# Altium PCB IMU_PCB.PcbDoc
Units mm, origin at the board's own origin, x right, y up, seen from the top; angles counter-clockwise.
Board outline 40 x 40 mm, 2 copper layers (Top Layer, Bottom Layer); 15 components, 11 nets, 71 pads, 0 vias.
Unrouted connection lines stored in the file: 24.
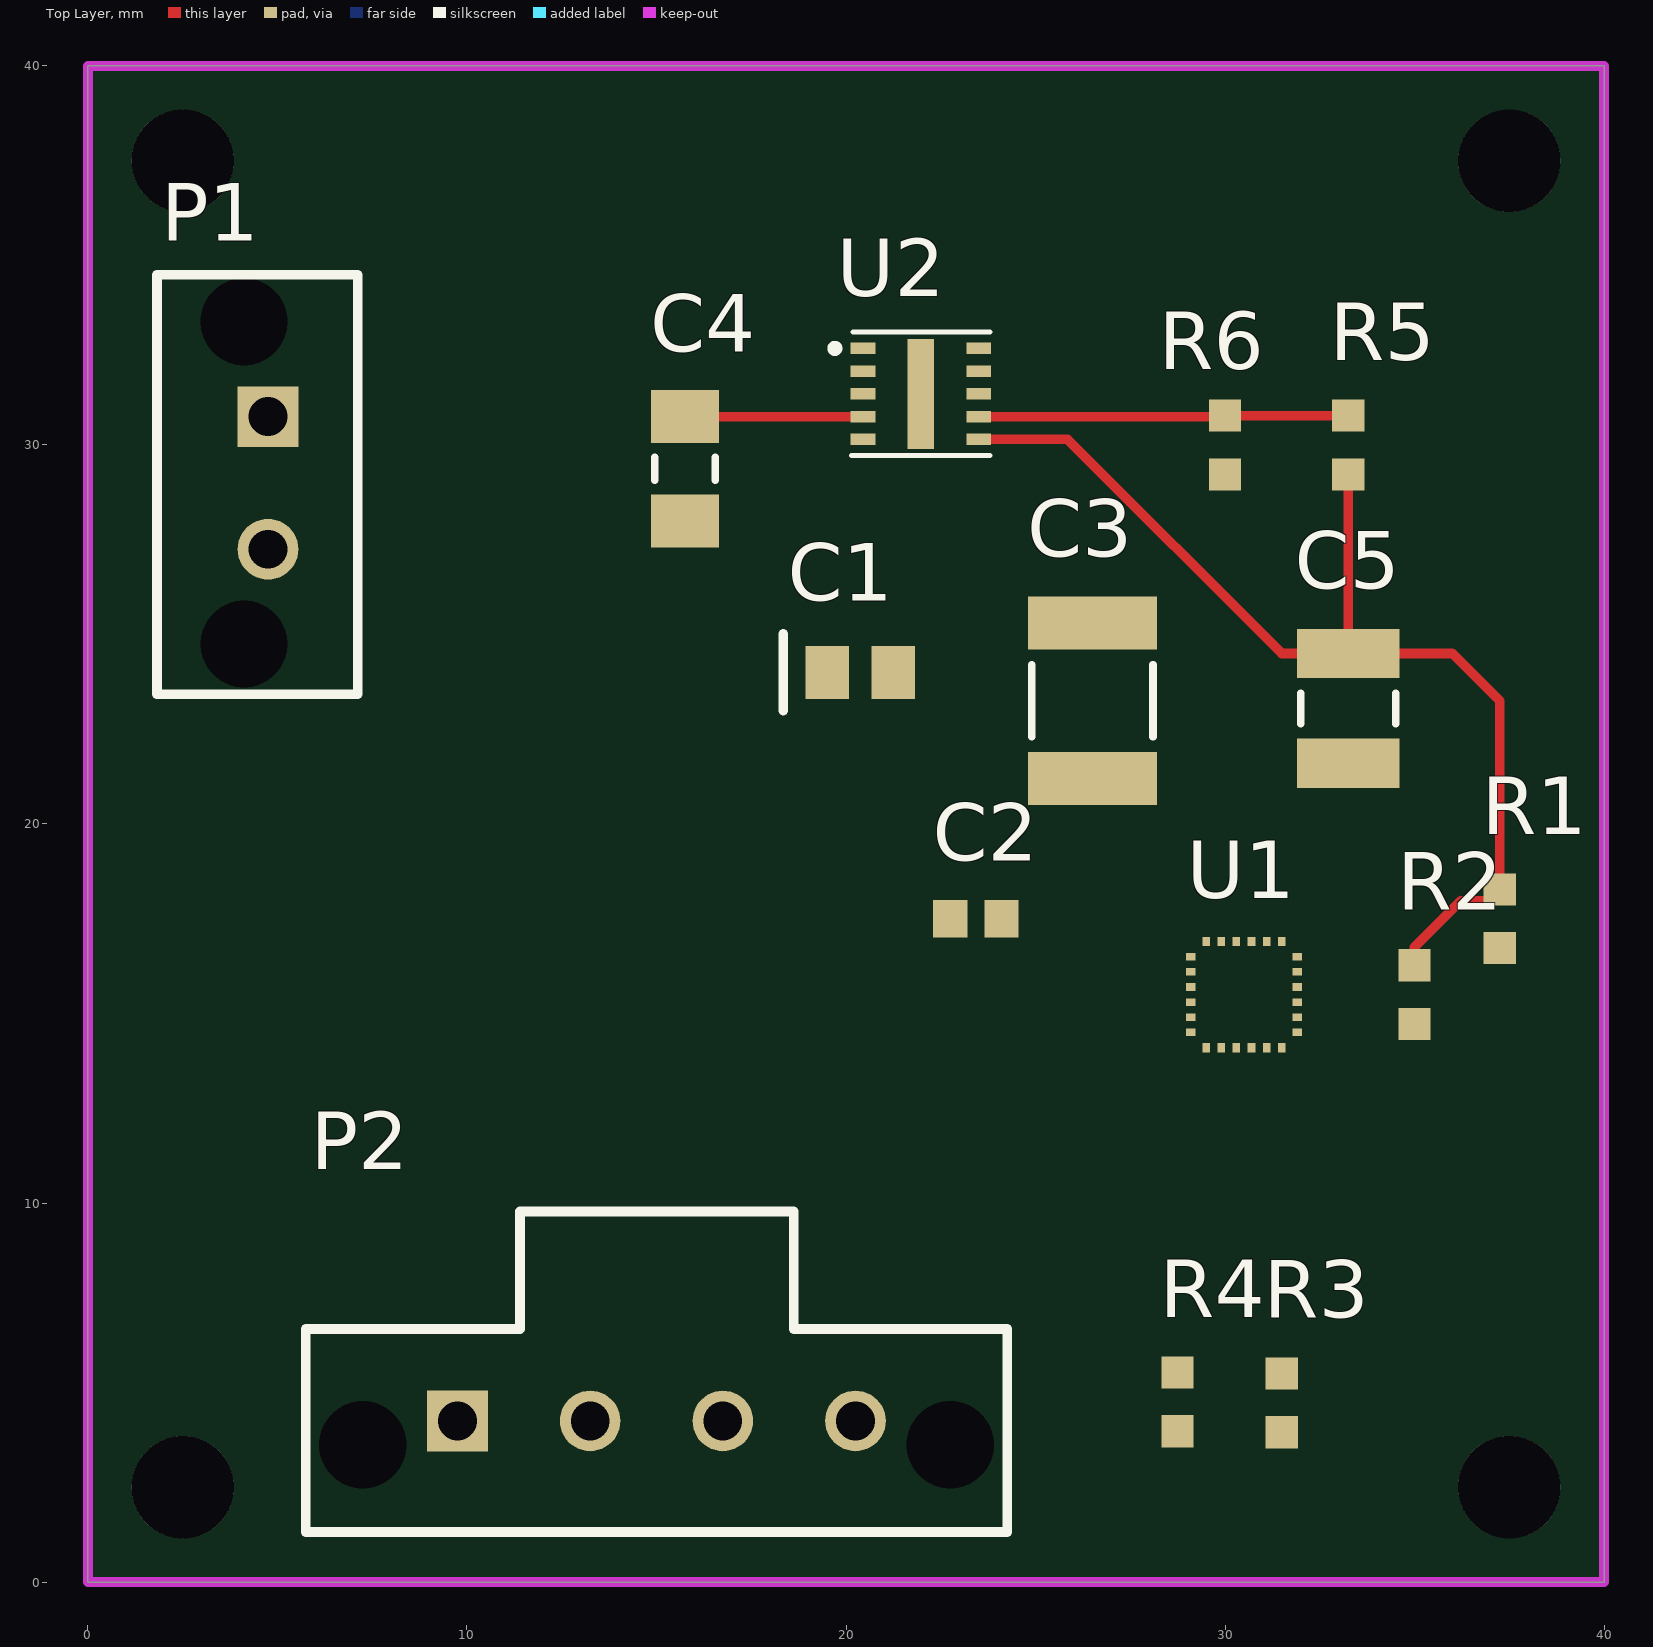
[diagram p0: Top Layer view]
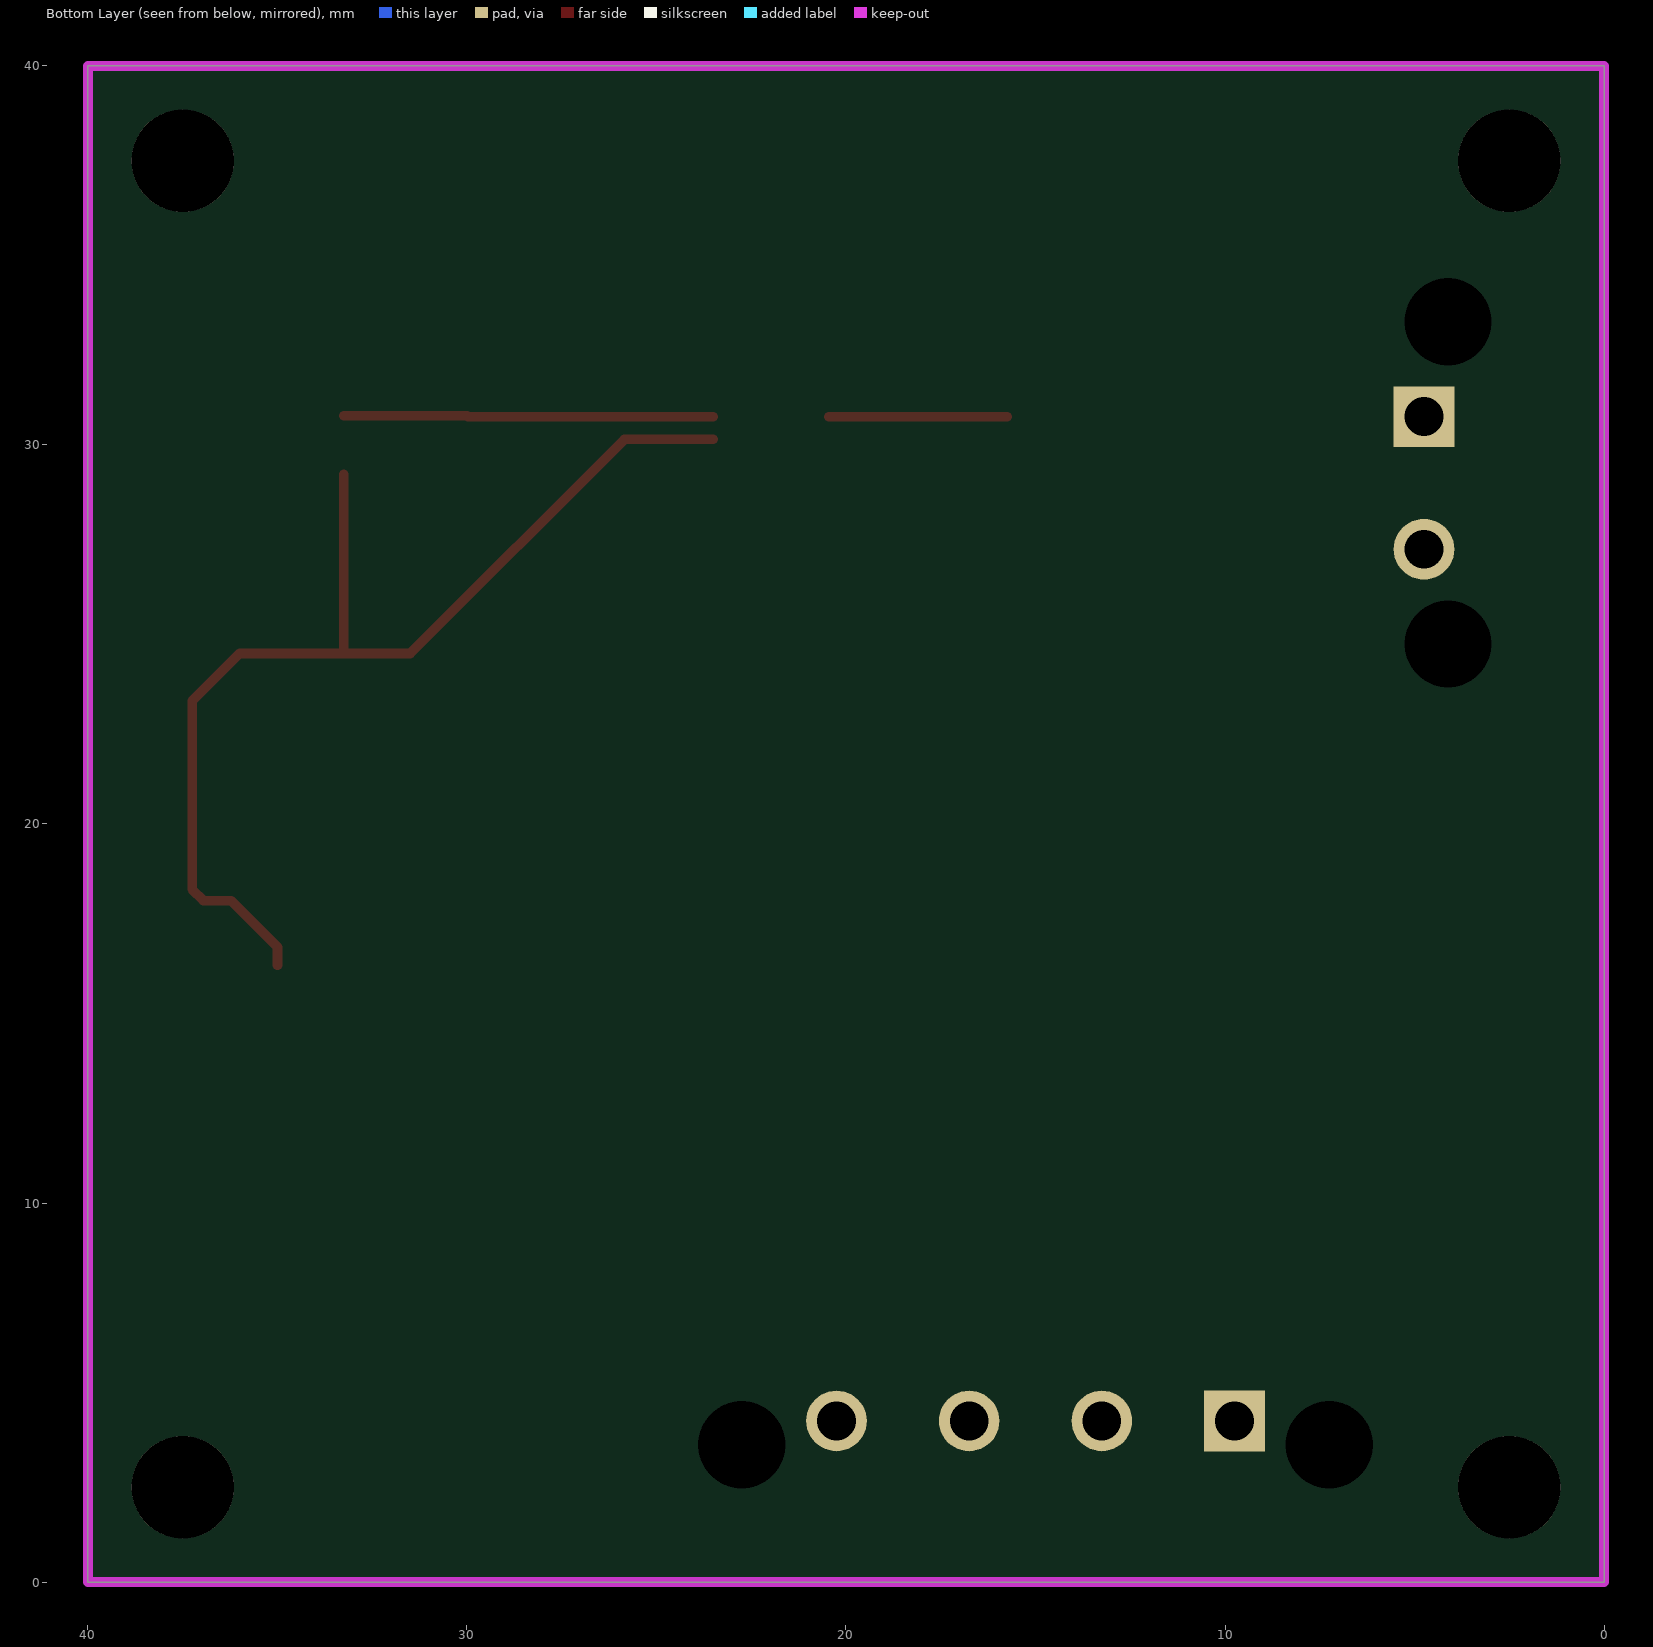
[diagram p1: Bottom Layer view, seen from below]

## Layer stack, top to bottom
Top Solder: solder mask 0.0102, Solder Resist, Dk 3.5
Top Layer: signal copper 0.0356
Dielectric 1: dielectric 0.32, FR-4, Dk 4.8
Bottom Layer: signal copper 0.0356
Bottom Solder: solder mask 0.0102, Solder Resist, Dk 3.5

## Board outline
0,0 40,0 40,40 0,40

## Design rules (kind name [scope] priority, off if disabled: settings)
Clearance [All] p1: gap=0.254 ignorepadtopadclearanceinfootprint=FALSE except(0: Arc-Hole Track-Hole SMDPad-Hole THPad-Hole Via-Hole Fill-Hole Poly-Hole Region-Hole Text-Hole)
PolygonConnect [All] p1: connectstyle=Relief reliefconductorwidth=0.254 reliefentries=4 polygonreliefangle="90 Angle" airgapwidth=0.254
RoomDefinition Midsun_Schematic_Template_B [InComponentClass('Midsun_Schematic_Template_B')] p1: confinementstyle=ConfineIn formatcopy=TRUE lockcomponents=FALSE outline 41,2 129,2 129,24 41,24
RoutingVias [All] p1: holewidth=0.711 width=1.27 viastyle="Through Hole" minholewidth=0.711 minwidth=1.27 maxholewidth=0.711 maxwidth=1.27
SolderMaskExpansion [All] p1: expansion=0.102
Width [All] p1: maxlimit=0.254 minlimit=0.254 preferedwidth=0.254
30 further rules are at their usual default settings.

## Components (designator, comment, footprint, x,y, rotation, side; value= is the part's Value field where it differs from the comment)
C1 "1UF 25V" "CAP, TANTALUM 0805" 20.375,24 r0 top
C2 "CAP CER 0.1UF 50V 10% X7R 0603" "CAP, 0603" 23.425,17.5 r0 top
C3 "CAP 470nF 50V 1812(4532)" CAPC1812(4532)230_N 26.5,23.25 r270 top value=470nF
C4 "CAP CER 10uF 50V 20% X5R 1206" "CAP, 1206" 15.75,29.375 r90 top
C5 "CAP CER 47UF 6.3V X7R 1210" 1210 33.26,23.059 r270 top
P1 "CONN 2POS ULTRA-FIT 0.138\"" "CONN, 2POS ULTRA-FIT" 4.75,30.75 r270 top
P2 "CONN 4POS ULTRA-FIT 0.138\"" "CONN, 4POS ULTRA-FIT" 9.75,4.25 r0 top
R1 "RES 4.7K OHM 1% 1/10W 0603" "RES, 0603" 37.25,17.5 r270 top
R2 "RES 4.7K OHM 1% 1/10W 0603" "RES, 0603" 35,15.5 r270 top
R3 "RES 4.7K OHM 1% 1/10W 0603" "RES, 0603" 31.5,4.725 r90 top
R4 "RES 4.7K OHM 1% 1/10W 0603" "RES, 0603" 28.75,4.75 r90 top
R5 "RES 33K OHM 1% 1/4W 0603" "RES, 0603" 33.25,30 r270 top
R6 "RES SMD 15K OHM 1% 1/10W 0603" "RES, 0603" 30,30 r90 top
U1 "Bosch BHI160B Inertial Measurement Unit" LGA24C40P8X8_300X300X95v3 30.5,15.5 r0 top
U2 "IC DC DC 3.3V 1A 10-uSIP" "IC DCDC 3.3V 1A 10-uSIP" 21.975,31.35 r0 top

## Footprints (in the part's own frame and the unit in brackets; to place one, negate y for a bottom-side part, rotate by r counter-clockwise, add the part's x,y. Pads: shape width x height; smd on the part's side, far side on the other; paste and mask are expansions set on the pad)
1210 [mm]
  rect 1.3x2.7 smd: 1(-1.441,-0.01) 2(1.459,-0.01)
  silkscreen extent -0.39,-1.26 0.41,1.24, body extent -1.69,-1.36 1.71,1.34, height 1.5
"CAP, 0603" [mm] "Chip Capacitor, 2-Leads, Body 1.60x0.81mm, IPC Medium Density"
  rect 0.9x1 smd mask+0.076: 1(-0.675,0) 2(0.675,0)
  body extent -0.87,-0.48 0.87,0.48, height 0.9
"CAP, 1206" [mm] "Chip Capacitor, 2-Leads, Body 3.20x1.60mm, IPC Medium Density"
  rect 1.4x1.8 smd: 1(-1.375,0) 2(1.375,0)
  silkscreen extent -0.3,-0.8 0.3,0.8, body extent -1.68,-0.87 1.67,0.87, height 1.8
"CAP, TANTALUM 0805" [mm] "Chip Capacitor, 2-Leads, Body 2.00x1.25mm, IPC Medium Density"
  rect 1.15x1.4 smd: 1(-0.875,0) 2(0.875,0)
  silkscreen extent -2.03,-1.02 -2.03,1.02, body extent -1,-0.63 1,0.63, height 1.25
CAPC1812(4532)230_N [mm] "Chip Capacitor, Body 4.5x3.2mm, Height 2.3mm, IPC Medium Density"
  rect 1.4x3.4 smd: 1(-2.05,0) 2(2.05,0)
  silkscreen extent -0.95,-1.6 0.95,1.6, body extent -2.4,-1.7 2.4,1.7, height 2.3
"CONN, 2POS ULTRA-FIT" [mm] "2 Positions Header, Shrouded Connector 0.138\" (3.50mm) Through Hole Gold"
  rect 1.6x1.6 hole 1.02: 1(0,0)
  round 1.6 hole 1.02: 2(3.5,0)
  round 1.6 hole 2.3: ""(-2.5,-0.63) ""(6,-0.63)
  silkscreen extent -3.74,-2.93 7.33,2.37, body extent -3.48,-2.87 7.12,5.79, height 13.85
"CONN, 4POS ULTRA-FIT" [mm]
  rect 1.6x1.6 hole 1.02: 1(0,0)
  round 1.6 hole 1.02: 2(3.5,0) 3(7,0) 4(10.5,0)
  round 0 hole 2.3: ""(-2.5,-0.63) ""(13,-0.63)
  silkscreen extent -4,-2.93 14.5,5.53, body extent -3.54,-2.78 14.06,5.88, height 13.85
"IC DCDC 3.3V 1A 10-uSIP" [mm] "LMZM23601"
  rect 0.65x0.3 smd: 1(-1.525,1.2) 2(-1.525,0.6) 3(-1.525,0) 4(-1.525,-0.6) 5(-1.525,-1.2) 6(1.525,-1.2) 7(1.525,-0.6) 8(1.525,0) 9(1.525,0.6) 10(1.525,1.2)
  rect 0.7x2.9 smd: 11(0,0)
  silkscreen extent -2.37,-1.63 1.83,1.63, body extent -1.9,-1.5 1.9,1.5, height 1.58
LGA24C40P8X8_300X300X95v3 [mm] "LGA, 24-Leads, Body 3.00x3.00mmx0.95mm, Pitch 0.40mm"
  rect 0.2x0.25 smd: 1(-1,1.4) 2(-0.6,1.4) 3(-0.2,1.4) 4(0.2,1.4) 5(0.6,1.4) 6(1,1.4) 13(1,-1.4) 14(0.6,-1.4) 15(0.2,-1.4) 16(-0.2,-1.4) 17(-0.6,-1.4) 18(-1,-1.4)
  rect 0.25x0.2 smd: 7(1.4,1) 8(1.4,0.6) 9(1.4,0.2) 10(1.4,-0.2) 11(1.4,-0.6) 12(1.4,-1) 19(-1.4,-1) 20(-1.4,-0.6) 21(-1.4,-0.2) 22(-1.4,0.2) 23(-1.4,0.6) 24(-1.4,1)
  body extent -1.5,-1.6 1.5,1.4, height 0.95
"RES, 0603" [mm] "Chip Resistor, 2-Leads, Body 1.60x0.80mm, IPC Medium Density"
  rect 0.85x0.85 smd: 1(-0.775,0) 2(0.775,0)
  body extent -0.8,-0.4 0.8,0.4, height 0.55

## Part data
C1: library part "CAP TANT 1UF 25V 10% 0805", "1µF Molded Tantalum Capacitors 25V 0805 (2012 Metric) 8 Ohm", ESR (Equivalent Series Resistance)="8 Ohm", Lifetime @ Temp.=-, Manufacturer 1="AVX Corporation", Manufacturer Part Number 1=TAJR105K025RNJ, Manufacturer Size Code=R, Operating Temperature="-55°C ~ 125°C", Package / Case="0805 (2012 Metric)", Supplier Part Number 1=478-8928-1-ND, Tolerance=±10%, Category=Capacitors, ComponentLink1Description=http://datasheets.avx.com/TAJ_LOW_PROFILE.pdf, ComponentLink1URL=http://datasheets.avx.com/TAJ_LOW_PROFILE.pdf, Description 1="CAP TANT 1UF 25V 10% 0805", Failure Rate=-, Features="General Purpose", Height - Seated (Max)="0.047\" (1.20mm)", Lead Spacing=-, Mounting Type="Surface Mount", Packaging="Cut Tape (CT)", Part Status=Active, Pricing 1="1=0.95, 10=0.672, 100=0.4428, 500=0.32802, 1000=0.27882 (CAD)", RoHS="RoHS Compliant", Size / Dimension="0.081\" L x 0.051\" W (2.05mm x 1.30mm)", Stock 1=16110, Supplier 1=Digi-Key, Type=Molded
C2: "0.10µF ±10% 50V Ceramic Capacitor X7R 0603 (1608 Metric)", Capacitance=0.1µF, Manufacturer 1="AVX Corporation", Manufacturer Part Number 1=06035C104KAT2A, Operating Temperature="-55°C ~ 125°C", Package / Case="0603 (1608 Metric)", Ratings=-, Supplier Part Number 1=478-5052-1-ND, Temperature Coefficient=X7R, Tolerance=±10%, Voltage=50V, ComponentLink1Description=http://datasheets.avx.com/X7RDielectric.pdf, ComponentLink1URL=http://datasheets.avx.com/X7RDielectric.pdf, Height - Seated (Max)=-, Lead Spacing=-, Lead Style=-, Mounting Type="Surface Mount, MLCC", Packaging="Cut Tape (CT)", Part Status=Active, Size / Dimension="0.063\" L x 0.032\" W (1.60mm x 0.81mm)", Supplier 1=Digi-Key, Thickness (Max)="0.035\" (0.90mm)"
C3: library part CMP-1040-01541-1, "CAP 470nF 50V ±10% 1812 (4532 Metric) Thickness 2.3mm SMD", Case-EIA=1812, Case-Metric=4532, Rated Voltage="50 V", Tolerance=±10%, Max Thickness="2.3 mm", Technology=SMT
C4: "10µF ±20% 50V Ceramic Capacitor X5R 1206 (3216 Metric)", Capacitance="10 uF", Case/Package=1206, Case Code (Metric)=3216, Manufacturer=Murata, Manufacturer Part Number=GRT31CR61H106ME01L, Max Operating Temperature=85°C, Min Operating Temperature=-55°C, Rating=X5R, Ratings=AEC-Q200, Supplier Part Number 1=490-12457-1-ND, Tolerance=20%, Voltage Rating=50V, Case Code (Imperial)=1206, Length=0.126inch, Mount="Surface Mount", Packaging="Tape and Reel", Pricing 1="1 = 0.57000, 10 = 0.39800, 100 = 0.23910, 500 = 0.17930, 1000 = 0.15141 (USD)", RoHS=Yes, Stock 1=449467, Supplier 1=Digi-Key, Thickness=0.071inch, Width=0.063inch
C5: "47µF ±10% 6.3V Ceramic Capacitor X7R 1210 (3225 Metric)", Capacitance=47uF, Case/Package=1210, Case Code (Metric)=3225, Dielectric=X7R, Manufacturer=Murata, Manufacturer Part Number=GCJ32ER70J476KE01L, Max Operating Temperature=125°C, Min Operating Temperature=-55°C, Package Quantity=1000, Ratings=AEC-Q200, Supplier Part Number 1=490-10559-1-ND, Tolerance=10%, Voltage Rating=6.3V, Case Code (Imperial)=1210, Features="Soft Termination", Height=2.5mm, Lead Free="Lead Free", Length=0.126inch, Mount="Surface Mount", Packaging="Tape and Reel", Pricing 1="1 = 1.53000, 10 = 1.21200, 100 = 0.90890, 500 = 0.68670 (USD)", RoHS=Yes, Stock 1=191399, Supplier 1=Digi-Key, Termination=SMD/SMT, Thickness=0.11inch, Voltage Rating (DC)=6.3V, Weight=0.00388oz, Width=0.098inch
P1: "Connector Header Through Hole 2 position 0.138\" (3.50mm)", Color=Black, Manufacturer=Molex, Manufacturer Part Number=1722871102, Supplier Part Number 1=WM11701-ND, ComponentLink1Description=http://www.molex.com/pdm_docs/sd/1722861302_sd.pdf, ComponentLink1URL=http://www.molex.com/pdm_docs/sd/1722861302_sd.pdf, Connector Type="Male Pin", Contact Plating=Tin, Fastening Type=Latch, Mount="Through Hole", Number of Positions=2, Number of Rows=1, Packaging=Tray, Pitch=0.138inch, Pricing 1="1 = 0.78000, 10 = 0.68800, 100 = 0.59380, 500 = 0.48582, 1000 = 0.43184, 5000 = 0.37786, 10000 = 0.35897 (USD)", RoHS=Yes, Series=UltraFit, Stock 1=2743, Supplier 1=Digi-Key, Termination=Solder
P2: "4 Positions Header Connector 0.138\" (3.50mm) Through Hole Tin", Current Rating=-, Insulation Color=Black, Manufacturer 1="Molex, LLC", Manufacturer Part Number 1=1722871104, Material Flammability Rating="UL94 V-0", Operating Temperature="-40°C ~ 105°C", Supplier Part Number 1=WM11703-ND, Voltage=400V, ComponentLink1Description=http://www.molex.com/pdm_docs/sd/1722871104_sd.pdf, ComponentLink1URL=http://www.molex.com/pdm_docs/sd/1722871104_sd.pdf, Connector Type=Header, Contact Finish - Mating=Tin, Contact Finish - Post=Tin, Contact Finish Thickness - Mating="60µin (1.52µm)", Contact Finish Thickness - Post="60µin (1.52µm)", Contact Length - Mating=-, Contact Length - Post="0.126\" (3.20mm)", Contact Material="Copper Alloy", Contact Shape=Square, Contact Type="Male Pin", Fastening Type="Latch Holder", Ingress Protection=-, Insulation Height="0.465\" (11.80mm)", Insulation Material="Liquid Crystal Polymer (LCP)", Mated Stacking Heights=26.99mm, Mounting Type="Through Hole", Number of Positions=4, Number of Positions Loaded=All, Number of Rows=1, Overall Contact Length=-, Packaging=Tray, Part Status=Active, Pitch - Mating="0.138\" (3.50mm)", Row Spacing - Mating=-, Series=UltraFit, Shrouding="Shrouded - 4 Wall", Style="Board to Cable/Wire", Supplier 1=Digi-Key, Termination=Solder
R1 R2 R3 R4: "4.7k Ohm ±1% 0.1W, 1/10W Chip Resistor 0603 (1608 Metric) Moisture Resistant Thick Film", Manufacturer 1=Yageo, Manufacturer Part Number 1=RC0603FR-074K7L, Operating Temperature="-55°C ~ 155°C", Package / Case="0603 (1608 Metric)", Power (Watts)=1/10W, Resistance (Ohms)=4.7k, Supplier Device Package=0603, Supplier Part Number 1=311-4.70KHRCT-ND, Temperature Coefficient=±100ppm/°C, Tolerance=±1%, Category=Resistors, ComponentLink1Description=http://www.yageo.com/documents/recent/PYu-RC_Group_51_RoHS_L_7.pdf, ComponentLink1URL=http://www.yageo.com/documents/recent/PYu-RC_Group_51_RoHS_L_7.pdf, Composition="Thick Film", Description 1="RES SMD 4.7K OHM 1% 1/10W 0603", Failure Rate=-, Features="Moisture Resistant", Height - Seated (Max)="0.022\" (0.55mm)", Packaging="Cut Tape (CT)", Part Status=Active, Pricing 1="1=0.16, 10=0.022, 100=0.0089, 1000=0.00402, 2500=0.00349 (CAD)", RoHS="RoHS Compliant", Size / Dimension="0.063\" L x 0.031\" W (1.60mm x 0.80mm)", Stock 1=3487566, Supplier 1=Digi-Key
R5: "RES SMD 33K OHM 1% 1/4W 0603", Manufacturer 1="Panasonic Electronic Components", Manufacturer Part Number 1=ERJ-PA3F3302V, Operating Temperature="-55°C ~ 155°C", Package / Case="0603 (1608 Metric)", Power=1/4W, Resistance=33k, Supplier Device Package=0603, Supplier Part Number 1=P33KBYCT-ND, Temperature Coefficient=±100ppm/°C, Tolerance=±1%, ComponentLink1Description=https://industrial.panasonic.com/cdbs/www-data/pdf/RDO0000/AOA0000C291.pdf, ComponentLink1URL=https://industrial.panasonic.com/cdbs/www-data/pdf/RDO0000/AOA0000C291.pdf, Composition="Thick Film", Failure Rate=-, Height - Seated (Max)="0.022\" (0.55mm)", Packaging="Cut Tape (CT)", Part Status=Active, Size / Dimension="0.063\" L x 0.031\" W (1.60mm x 0.80mm)", Supplier 1=Digi-Key
R6: "15 kOhms ±1% 0.1W, 1/10W Chip Resistor 0603 (1608 Metric) Moisture Resistant Thick Film", Case/Package=0603, Case Code (Metric)=1608, Manufacturer=Yageo, Manufacturer Part Number=RC0603FR-0715KL, Max Operating Temperature=155°C, Max Power Dissipation=100mW, Min Operating Temperature=-55°C, Package Quantity=1, Resistance=15kR, Supplier Part Number 1=311-15.0KHRCT-ND, Temperature Coefficient=100ppm/°C, Tolerance=1%, Voltage Rating=50V, Case Code (Imperial)=0603, ComponentLink1Description=http://www.yageo.com/documents/recent/PYu-RC_Group_51_RoHS_L_10.pdf, ComponentLink1URL=http://www.yageo.com/documents/recent/PYu-RC_Group_51_RoHS_L_10.pdf, ComponentLink2Description=http://www.yageo.com/documents/recent/PYu-RC_Group_51_RoHS_L_9.pdf, ComponentLink2URL=http://www.yageo.com/documents/recent/PYu-RC_Group_51_RoHS_L_9.pdf, ComponentLink3Description=https://www.verical.com/server-webapp/html/getDatasheet?partID=327895, ComponentLink3URL=https://www.verical.com/server-webapp/html/getDatasheet?partID=327895, Composition="Thick Film", Depth=0.8mm, Features="Moisture Resistant", Height=0.022inch, Lead Free="Lead Free", Length=1.6mm, Military Standard=Not, Number of Pins=2, Number of Terminations=2, Packaging="Tape and Reel", Power Rating=100mW, Pricing 1="1 = 0.10000, 10 = 0.02400, 100 = 0.00970, 1000 = 0.00437, 2500 = 0.00379 (USD)", REACH SVHC=Unknown, RoHS=Yes, Stock 1=8520111, Supplier 1=Digi-Key, Termination=SMD/SMT, Voltage Rating (DC)=50V, Width=0.031inch
U1: library part IMU_BHI160B, Manufacturer 1="Bosch Sensortec", Manufacturer Part Number 1=BHI160B, Supplier Part Number 1=828-1089-1-ND, Pricing 1="1=10.78000, 5=9.46000, 10=8.51400, 25=7.56800, 50=7.00040, 100=6.05440, 500=5.67600, 1000=5.29760 (USD)", RoHS=No, Stock 1=8497, Supplier 1=Digi-Key
U2: "Non-Isolated PoL Module DC DC Converter 1 Output 3.3V 1A 4V - 36V Input", Manufacturer="Texas Instruments", Manufacturer Part Number=LMZM23601V3SILR, Max Operating Temperature=125°C, Min Operating Temperature=-40°C, Supplier Part Number 1=296-51381-1-ND, ComponentLink1Description=Datasheet, ComponentLink1URL=http://www.ti.com/lit/ds/symlink/lmzm23601.pdf, Pricing 1="1 = 5.76000, 10 = 5.17700, 100 = 4.24200, 500 = 3.61110, 1000 = 3.04550 (USD)", Stock 1=1291, Supplier 1=Digi-Key

## Free pads (board coordinates)
  round 2.7 hole 2.7: ""(2.5,2.5) ""(2.5,37.5) ""(37.5,2.5) ""(37.5,37.5)

## Nets (pads, with @x,y where several pads share a name; then routed paths per layer and width w, separated by ;. In a path a pad name is that pad's centre, name@x,y a point inside that pad or via, vN(x,y) a via of type N, cw(c..) or ccw(c..) an arc to the next point about the centre after c; other vN are vias at no path point)
ASCK: R4.2 U1.7
ASDA: R3.2 U1.21
FB: R5.1 R6.2 U2.7 | length 9.8
  Top Layer w0.254: U2.7 29.975,30.75 R6.2 R5.1
GND: C1.2 C2.2 C3.1 C4.1 C5.2 P1.2 P2.4 R6.1 U1.18 U2.1 U2.2
INT: P2.3 U1.12
NetP2_1: P2.1 R2.2
SCK: U1.23
SDA: P2.2 R1.2 U1.24
VBAT: C4.2 P1.1 U2.3 U2.4 | length 4.7
  Top Layer w0.254: C4.2 U2.4
VDDIO: C1.1 C2.1 C5.1 R1.1 R2.1 R3.1 R4.1 R5.2 U1.8 U2.6 | length 29.7
  Top Layer w0.254: U2.6 25.85,30.15 31.5,24.5 C5.1 ; R5.2 C5.1 ; R2.1 35,16.75 36.227,17.977 36.952,17.977 R1.1 37.25,23.25 36,24.5 C5.1
VREG: C3.2 U1.10
pads on no net: P1. P2. U1.1 U1.2 U1.3 U1.4 U1.5 U1.6 U1.9 U1.11 U1.13 U1.14 U1.15 U1.16 U1.17 U1.19 U1.20 U1.22 U2.5 U2.8 U2.9 U2.10 U2.11

## Keep-outs
Keep-Out Layer:
  the board outline again, w0.254